# Altium PCB PCB.PcbDoc
Units mil, origin at the board's own origin, x right, y up, seen from the top; angles counter-clockwise.
Board outline 6000 x 4000 mil, 2 copper layers (Top Layer, Bottom Layer); 56 components, 40 nets, 185 pads, 34 vias.
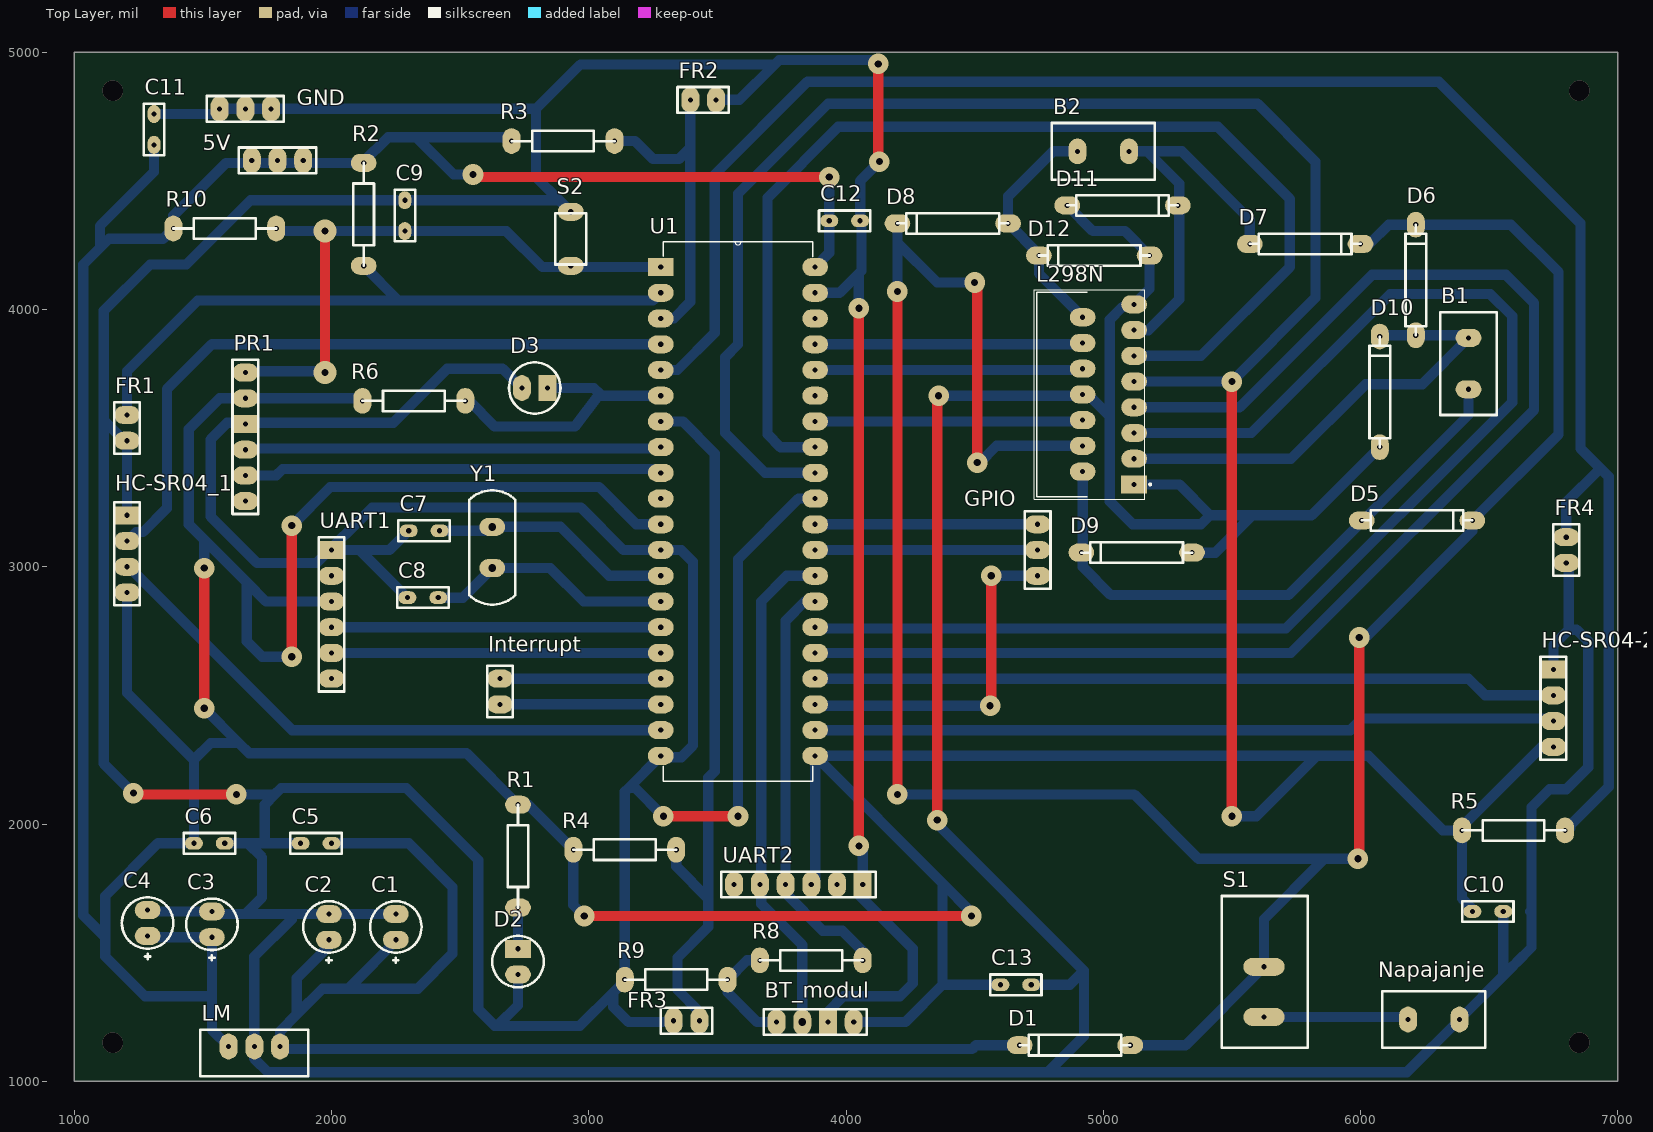
[diagram p0: Top Layer view]
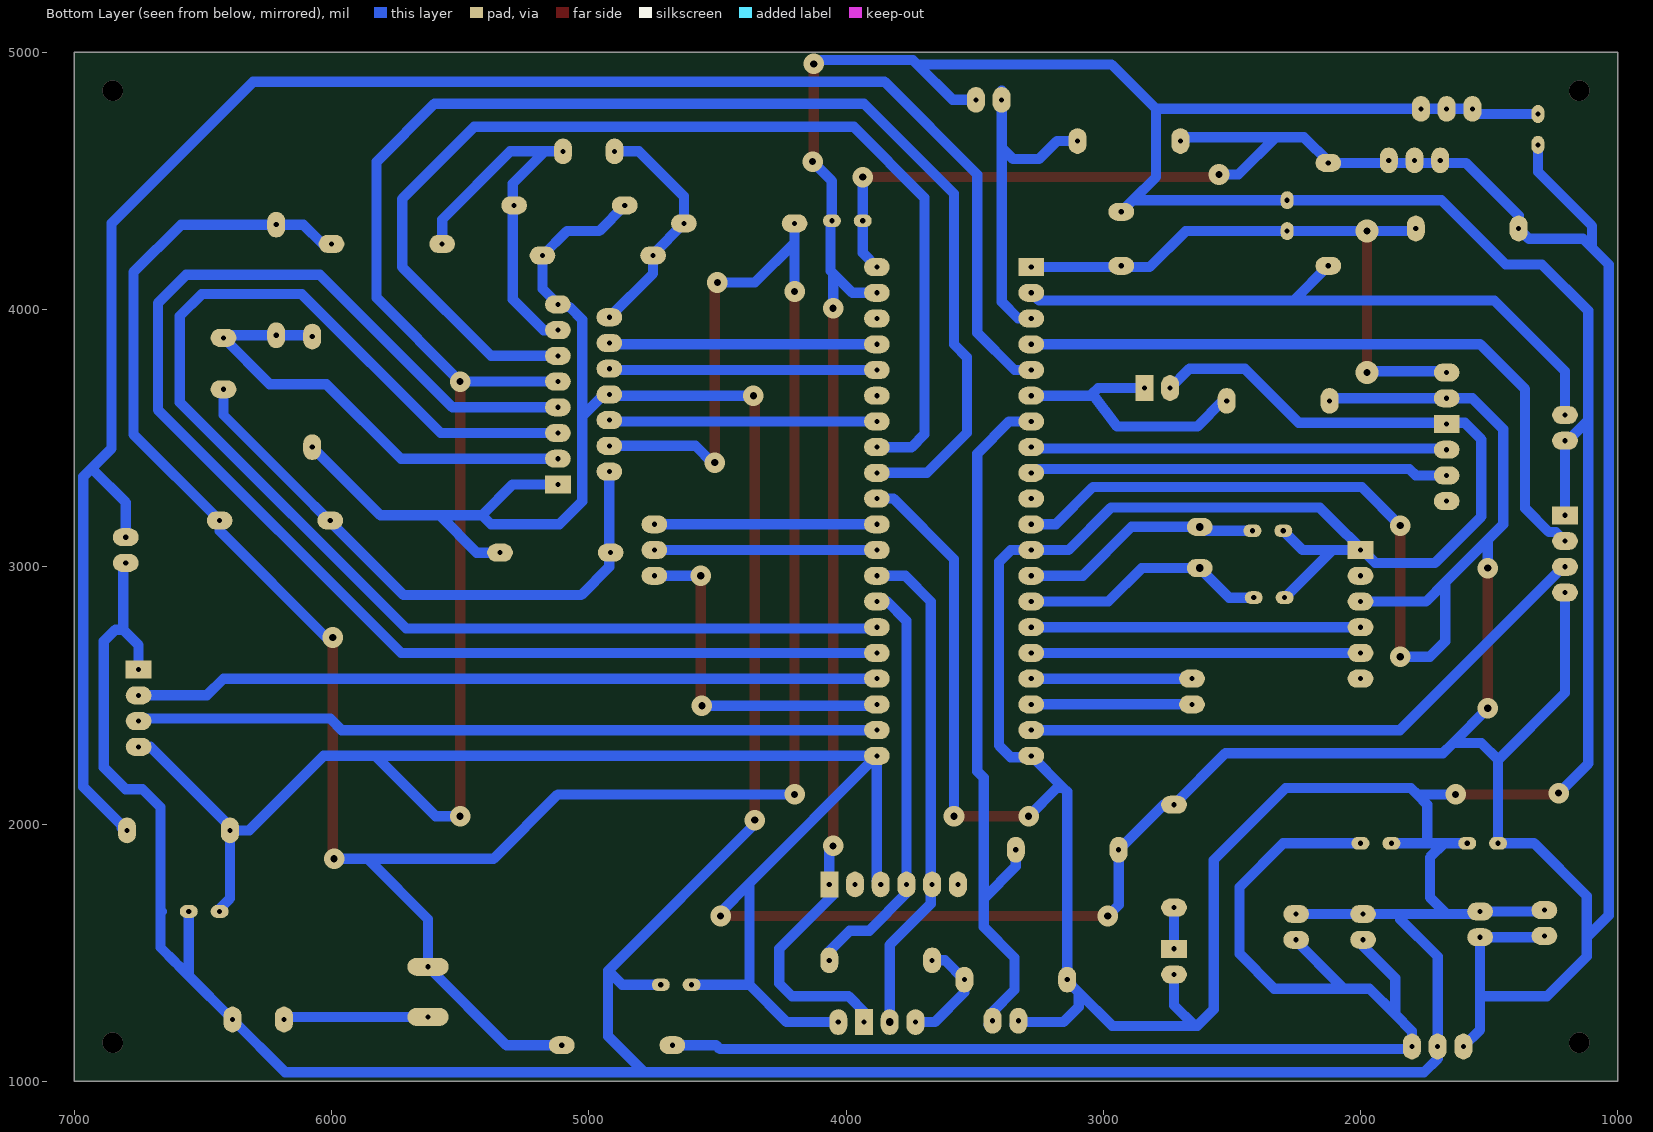
[diagram p1: Bottom Layer view, seen from below]

## Layer stack, top to bottom
Top Solder: solder mask 0.4, Solder Resist, Dk 3.5
Top Layer: signal copper 1.4
Dielectric 1: dielectric 12.6, FR-4, Dk 4.8
Bottom Layer: signal copper 1.4
Bottom Solder: solder mask 0.4, Solder Resist, Dk 3.5

## Board outline
1000,1000 7000,1000 7000,5000 1000,5000

## Design rules (kind name [scope] priority, off if disabled: settings)
Clearance [All] p1: gap=10 ignorepadtopadclearanceinfootprint=FALSE except(0: Arc-Hole Track-Hole SMDPad-Hole THPad-Hole Via-Hole Fill-Hole Poly-Hole Region-Hole Text-Hole)
PolygonConnect [All] p1: connectstyle=Relief reliefconductorwidth=10 reliefentries=4 polygonreliefangle="90 Angle" airgapwidth=10
RoutingVias [All] p1: holewidth=28 width=50 viastyle="Through Hole" minholewidth=28 minwidth=50 maxholewidth=28 maxwidth=50
SolderMaskExpansion [All] p1: expansion=4
Width [All] p1: maxlimit=40 minlimit=40 preferedwidth=40
30 further rules are at their usual default settings.

## Components (designator, comment, footprint, x,y, rotation, side; value= is the part's Value field where it differs from the comment)
5V "POWER1" MOST3 1790,4580 r180 top
B1 "Motor" Kleam 6420,3790 r180 top
B2 "Motor" Kleam 5000,4615 r270 top
BT_modul "BT-modul" BT_CON 3880,1230 r180 top
C1 "Cap Pol1" CAP-rad 2250,1600 r90 top value=220uF
C2 "Cap Pol1" CAP-rad 1990,1600 r90 top value=220uF
C3 "Cap Pol1" CAP-rad 1535,1610 r90 top value=220uF
C4 "Cap Pol1" CAP-rad 1285,1615 r90 top value=220uF
C5 "Cap" CAP-200x80 1940,1925 r180 top value=100nF
C6 "Cap" CAP-200x80 1525,1925 r0 top value=100nF
C7 "Cap" CAP-200x80 2360,3140 r180 top value=33pF
C8 "Cap" CAP-200x80 2355,2880 r0 top value=33pF
C9 "Cap" CAP-200x80 2285,4365 r270 top value=100nF
C10 "Cap" CAP-200x80 6495,1660 r0 top value=100nF
C11 "Cap" CAP-200x80 1310,4700 r90 top value=100nF
C12 "Cap" CAP-200x80 3995,4345 r0 top value=100nF
C13 "Cap" CAP-200x80 4660,1375 r0 top value=100nF
D1 "Diode" DIOD430X80 4890,1140 r180 top
D2 "LED0" LED200mil 2725,1465 r270 top
D3 "LED0" LED200mil 2790,3695 r180 top
D5 "Diode" DIOD430X80 6220,3180 r0 top
D6 "Diode" DIOD430X80 6215,4115 r90 top
D7 "Diode" DIOD430X80 5785,4255 r0 top
D8 "Diode" DIOD430X80 4415,4335 r180 top
D9 "Diode" DIOD430X80 5130,3055 r180 top
D10 "Diode" DIOD430X80 6075,3680 r90 top
D11 "Diode" DIOD430X80 5075,4405 r0 top
D12 "Diode" DIOD430X80 4965,4210 r180 top
FR1 "FotoRes" MOST2 1205,3540 r90 top
FR2 "FotoRes" MOST2 3445,4815 r180 top
FR3 "FotoRes" MOST2 3380,1235 r0 top
FR4 "FotoRes" MOST2 6800,3065 r90 top
GND "POWER2" MOST3 1665,4780 r0 top
GPIO "FREE_PORT" MOST3 4745,3065 r270 top
HC-SR04-2 "HC-SR04" MOST4 6750,2450 r270 top
HC-SR04_1 "HC-SR04" MOST4 1205,3050 r270 top
Interrupt "Imterrupt" MOST2 2655,2515 r90 top
L298N "L298N" TO127P2020X500X2100-15 5120,3320 r180 top
LM "LM7805" LM7805 1700,1100 r180 top
Napajanje "Napajanje" Kleam 6285,1240 r270 top
PR1 "Programator" PIC-PROGRAMATOR 1665,3505 r270 top
R1 "Res1" R430x80 2725,1875 r90 top value=4K7
R2 "Res1" R430x80 2125,4370 r90 top value=10k
R3 "Res1" R430x80 2900,4655 r180 top value=10k
R4 "Res1" R430x80 3140,1900 r180 top value=10k
R5 "Res1" R430x80 6595,1975 r180 top value=10k
R6 "Res1" R430x80 2320,3645 r180 top value=4K7
R8 "Res1" R430x80 3865,1470 r0 top value=4K7
R9 "Res1" R430x80 3340,1395 r0 top value=10k
R10 "Res1" R430x80 1585,4315 r180 top value=10k
S1 "SW-SPST" PREKIDAC 5620,1530 r0 top
S2 "SW-PB" TASTER 2930,4275 r270 top
U1 "DSPIC30F4013" DIP254P1524X635-40 3880,2265 r0 top
UART1 "UART1" MOST6 2000,2815 r90 top
UART2 "UART2" MOST6 3815,1765 r0 top
Y1 "XTAL" XTAL 2625,3075 r270 top

## Footprints (in the part's own frame and the unit in brackets; to place one, negate y for a bottom-side part, rotate by r counter-clockwise, add the part's x,y. Pads: shape width x height; smd on the part's side, far side on the other; paste and mask are expansions set on the pad)
BT_CON [mil]
  oval 70x100 hole 20: 0(-150,0) 3(150,0)
  rect 70x100 hole 20: 1(-50,0)
  oval 70x100 hole 30: 2(50,0)
  silkscreen extent -200,-50 200,50
CAP-200x80 [mil] "CAP od nF i pF"
  oval 70x50 hole 20: 1(-60,0) 2(60,0)
  silkscreen extent -100,-40 100,40
CAP-rad [mil]
  oval 70x100 hole 20: 1(-50,0) 2(50,0)
  silkscreen extent -140,-100 100,100
DIOD430X80 [mil]
  oval 100x70 hole 20: 1(-215,0) 2(215,0)
  silkscreen extent -215,-40 215,40
DIP254P1524X635-40 [mil]
  rect 100x70 hole 20: 1(-600,1900)
  oval 100x70 hole 20: 2(-600,1800) 3(-600,1700) 4(-600,1600) 5(-600,1500) 6(-600,1400) 7(-600,1300) 8(-600,1200) 9(-600,1100) 10(-600,1000) 11(-600,900) 12(-600,800) 13(-600,700) 14(-600,600) 15(-600,500) 16(-600,400) 17(-600,300) 18(-600,200) 19(-600,100) 20(-600,0) 21(0,0) 22(0,100) 23(0,200) 24(0,300) 25(0,400) 26(0,500) 27(0,600) 28(0,700) 29(0,800) 30(0,900) 31(0,1000) 32(0,1100) 33(0,1200) 34(0,1300) 35(0,1400) 36(0,1500) 37(0,1600) 38(0,1700) 39(0,1800) 40(0,1900)
  silkscreen extent -590,-98 -10,1998
Kleam [mil]
  oval 100x70 hole 20: 1(0,100) 2(0,-100)
  silkscreen extent -110,-200 110,200
LED200mil [mil]
  rect 70x100 hole 20: 1(-50,0)
  oval 70x100 hole 20: 2(50,0)
  silkscreen extent -100,-100 100,100
LM7805 [mil]
  oval 70x100 hole 20: 1(-100,-35) 2(0,-35) 3(100,-35)
  silkscreen extent -210,-100 210,80
MOST2 [mil]
  oval 70x100 hole 20: 1(-50,0) 2(50,0)
  silkscreen extent -100,-50 100,50
MOST3 [mil]
  oval 70x100 hole 20: 0(-100,0) 1(0,0) 2(100,0)
  silkscreen extent -150,-50 150,50
MOST4 [mil] "Konektor 400x100"
  rect 70x100 hole 20: 1(-150,0)
  oval 70x100 hole 20: 2(-50,0) 3(50,0) 4(150,0)
  silkscreen extent -200,-50 200,50
MOST6 [mil]
  oval 70x100 hole 20: 0(-250,0) 1(-150,0) 2(-50,0) 3(50,0) 4(150,0)
  rect 70x100 hole 20: 5(250,0)
  silkscreen extent -300,-50 300,50
PIC-PROGRAMATOR [mil]
  oval 70x100 hole 20: 1(-250,0) 2(-150,0) 4(50,0) 5(150,0) 6(250,0)
  rect 70x100 hole 20: 3(-50,0)
  silkscreen extent -300,-50 300,50
PREKIDAC [mil]
  oval 160x70 hole 20: 1(5,-280) 2(5,-85)
  silkscreen extent -160,-400 175,190
R430x80 [mil] "430 mils sa 80 mils"
  oval 70x100 hole 20: 1(-200,0) 2(200,0)
  silkscreen extent -200,-40 200,40
TASTER [mil] "200x120"
  oval 70x100 hole 20: 1(-105,0) 2(105,0)
  silkscreen extent -100,-60 100,60
TO127P2020X500X2100-15 [mil]
  rect 100x70 hole 20: 1(0,0)
  oval 100x70 hole 20: 2(200,-50) 3(0,-100) 4(200,-150) 5(0,-200) 6(200,-250) 7(0,-300) 8(200,-350) 9(0,-400) 10(200,-450) 11(0,-500) 12(200,-550) 13(0,-600) 14(200,-650) 15(0,-700)
  silkscreen extent -67,-757 389,57
XTAL [mil] "ZA OSCILATOR"
  oval 70x100 hole 30: 1(-80,0) 2(80,0)
  silkscreen extent -222,-90 222,90

## Part data
5V GND: library part POWER
B1 B2: "Motor, General Kind", LatestRevisionDate=17-Jul-2002, LatestRevisionNote="Re-released for DXP Platform.", PackageDescription="Capacitor (Radial); 2 Leads", PackageReference=RB5-10.5, Published=24-Mar-1999, Publisher="Altium Limited"
C1 C2 C3 C4: "Polarized Capacitor (Radial)", LatestRevisionDate=17-Jul-2002, LatestRevisionNote="Re-released for DXP Platform.", PackageDescription="Polarized Capacitor (Radial); 2 Leads", PackageReference=RB7.6-15, Published=8-Jun-2000, Publisher="Altium Limited"
C5 C6 C7 C8 C9 C10 C11 C12 C13: "Capacitor", LatestRevisionDate=17-Jul-2002, LatestRevisionNote="Re-released for DXP Platform.", PackageDescription="Radial Cap, Thru-Hole; 2 Leads; 0.3 in Pin Spacing", PackageReference=RAD-0.3, Published=8-Jun-2000, Publisher="Altium Limited"
D1 D5 D6 D7 D8 D9 D10 D11 D12: "Default Diode", Code_JEDEC=DO-214-AB, LatestRevisionDate=17-Jul-2002, LatestRevisionNote="Re-released for DXP Platform.", PackageDescription="DO-214-AB/SMC; 2 C-Bend Leads; Body 7.9 x 5.9 mm, inc. leads (LxW)", PackageReference=SMC, PackageVersion=Sep-1996, Published=8-Jun-2000, Publisher="Altium Limited"
D2 D3: "Typical INFRARED GaAs LED", LatestRevisionDate=08-Jul-2005, LatestRevisionNote="Mech Layer 1 removed.", PackageDescription="LED; 2 Leads", PackageReference=LED-0, Published=8-Jun-2000, Publisher="Altium Limited"
Interrupt Napajanje: library part "Header 2", "Header, 2-Pin", LatestRevisionDate=17-Jul-2002, LatestRevisionNote="Re-released for DXP Platform.", Publisher="Altium Limited"
R1 R2 R3 R4 R5 R6 R8 R9 R10: "Resistor", LatestRevisionDate=17-Jul-2002, LatestRevisionNote="Re-released for DXP Platform.", PackageDescription="Axial Device, Thru-Hole; 2 Leads; 0.3 in Pin Spacing", PackageReference=AXIAL-0.3, Published=8-Jun-2000, Publisher="Altium Limited"
S1: "Single-Pole, Single-Throw Switch", LatestRevisionDate=17-Jul-2002, LatestRevisionNote="Re-released for DXP Platform.", PackageDescription="Switch; 2 Leads", PackageReference=SPST-2, Published=24-Mar-1999, Publisher="Altium Limited"
S2: "Switch", LatestRevisionDate=17-Jul-2002, LatestRevisionNote="Re-released for DXP Platform.", PackageDescription="Switch; 2 Leads", PackageReference=SPST-2, Published=24-Mar-1999, Publisher="Altium Limited"
U1: library part DSPIC30F4013-20I/P, "High-Performance 16-bit Digital Signal Controller, 48 KB Flash, 2 KB SRAM, 1 KB EEPROM, 40-Pin PDIP, Industrial Temperature", Supplier Part Number 1=DSPIC30F4013-20IP-ND, ComponentLink1Description=Datasheet, ComponentLink1URL=http://ww1.microchip.com/downloads/en/DeviceDoc/70138F.pdf, ComponentLink2Description="Packaging Specification", ComponentLink2URL=http://www.microchip.com/stellent/groups/techpub_sg/documents/packagingspec/en012702.pdf, ComponentLink3Description="Microchip.com Home", ComponentLink3URL=http://www.microchip.com/, DatasheetVersion="revF, Apr-2008", PackageDescription="40-Lead Plastic Dual In-Line (P) - 600 mil Body [PDIP]", PackageReference=PDIP600-P40, PackageVersion="revBB, Aug-2009", Published=29-Jan-2009, Publisher="Altium Limited", Supplier 1=Digi-Key, Supplier 2=Farnell, Supplier Part Number 2=1439755
UART1 UART2: library part UART
Y1: "Crystal Oscillator", LatestRevisionDate=17-Jul-2002, LatestRevisionNote="Re-released for DXP Platform.", PackageDescription="Crystal, Thru-Hole; 2 Leads; Body 3.1 x 8.2 mm (Dia.xH)", PackageReference=R38, Published=8-Jun-2000, Publisher="Altium Limited"

## Via types
v1: diameter 80, hole 28, Top Layer to Bottom Layer, 28 vias
v2: diameter 80, hole 80, Top Layer to Bottom Layer, 4 vias
v3: diameter 90, hole 28, Top Layer to Bottom Layer, 2 vias

## Nets (pads, with @x,y where several pads share a name; then routed paths per layer and width w, separated by ;. In a path a pad name is that pad's centre, name@x,y a point inside that pad or via, vN(x,y) a via of type N, cw(c..) or ccw(c..) an arc to the next point about the centre after c; other vN are vias at no path point)
+5V: 5V.0 5V.1 5V.2 BT_modul.0 C3.1 C4.1 C6.1 C10.1 C11.1 C12.1 C13.1 HC-SR04-2.4 HC-SR04_1.4 L298N.9 LM.3 PR1.2 R1.2 R2.2 R3.2 R4.2 R5.2 R6.2 R10.2 U1.11 U1.21 U1.32 U1.40 UART1.3 UART2.3 | length 31697.3
  Top Layer w40: v1(1505,2450) v1(1505,2995) ; v1(1845,3160) v1(1845,2650) v1@1850,2645 ; v1@2555,4515 v1(3935,4515) ; v1(2982.5,1642.5) v1(4487.5,1642.5) ; v1(5500,2030) v1(5500,3720)
  Bottom Layer w40: HC-SR04_1.4 1205,2510 1465,2250 ; C4.1 1290,1560 C3.1 1535,1330 ; C11.1 1310,4535 1100,4325 1100,4250 1105,4245 ; v1(1505,2450) 1640,2315 ; v1(1505,2995) 1505,3105 ; LM.3 1535,1200 1535,1330 ; v1(1845,2650) 1730,2650 1670,2710 1670,2940 ; v1(1845,3160) 1995,3310 3040,3310 3185,3165 U1.11 ; UART1.3 1745,2865 1670,2940 ; R6.2@2105,3645 2095,3655 PR1.2 1565,3655 1445,3535 1445,3165 1505,3105 ; v1(2550,4525) 2475,4525 2330,4670 ; R3.2@2685,4655 2670,4670 2330,4670 ; R4.2@2940,1860 2940,1685 v1(2982.5,1642.5) ; R4.2 2765,2075 R1.2 2525,2275 1680,2275 1640,2315 ; UART2.3 3880,1780 U1.21 ; U1.32 3685,3365 3530,3520 3530,3815 3580,3865 3580,4450 3930,4800 5600,4800 5825,4575 5825,4045 v1(5500,3720) L298N.9 ; U1.40 3935,4220 C12.1 v1(3935,4515) ; BT_modul.0@4060,1230 4230,1230 4375,1375 ; v1(4487.5,1642.5) 4487.5,1657.5 4375,1770 ; C13.1 4375,1375 ; v1(5500,2030) 5595,2030 5825,2260 5820,2265 ; C10.1 6435,1670 6395,1710 R5.2 R5.2@6380,1975 ; HC-SR04-2.4 6705,2300 R5.2@6380,1975 ; 1105,4245 1135,4275 1345,4275 R10.2 1385,4365 1590,4570 1890,4570 2120,4570 2220,4670 2330,4670 ; 1105,4245 1035,4175 1035,1645 1120,1560 ; 1120,1560 1120,1485 1275,1330 1535,1330 ; 1120,1560 1120,1720 1325,1925 C6.1 1465,2250 ; 1465,2250 1530,2315 1640,2315 ; 1505,3105 1670,2940 ; U1.21 4375,1770 ; U1.21 5820,2265 ; 4375,1375 4375,1770 ; 5820,2265 6030,2265 6320,1975 R5.2@6380,1975
GND: BT_modul.1 C1.2 C2.2 C3.2 C4.2 C5.2 C6.2 C7.2 C8.1 C9.1 C10.2 C11.2 C12.2 C13.2 D2.2 D3.2 D9.1 D10.1 D11.1 D12.1 FR1.1 FR2.1 FR3.1 FR4.1 GND.0 GND.1 GND.2 HC-SR04-2.1 HC-SR04_1.1 L298N.1 L298N.8 L298N.15 LM.2 Napajanje.1 PR1.3 R9.1 S2.1 U1.12 U1.20 U1.31 U1.39 UART1.5 UART2.5 | length 40457.4
  Top Layer w40: v1(1230,2120) 1240,2130 1255,2115 v1(1630,2115) ; v1@3300,2030 v1(3580,2030) ; v1(4050,1915) v1(4050,4005) ; v1(4125,4955) 4125,4590 4115,4580 4125,4570 v1(4130,4575) ; v1(4355,2015) 4355,3650 4350,3655 v1(4360,3665)
  Bottom Layer w40: FR1.1@1185,3500 1115,3570 ; HC-SR04_1.1 FR1.1 ; v1(1230,2120) 1115,2235 1115,3570 ; C4.2 1290,1660 C3.2 1545,1650 1665,1650 ; C11.2 1545,4760 GND.0 GND.1 GND.2 2795,4780 ; C6.2 1675,1925 ; v1(1630,2115) 1780,2115 ; C5.2 1740,1925 ; UART1.5 2110,3065 ; C1.2 C2.2 1845,1650 ; C8.1@2300,2885 C8.1 2110,3065 ; C7.2 2225,3065 2110,3065 ; D2.2 2725,1295 2645,1215 ; D3.2 2665,3770 2450,3770 2240,3560 1595,3560 1530,3495 1530,3195 1710,3015 1943.08,3015 2158.08,3230 2970,3230 3135,3065 U1.12 3360,3065 3405,3020 3405,2305 3360,2260 U1.20@3285,2260 ; S2.1 2885,4425 ; U1.20 3155,2140 ; v1(3290,2030) 3180,2140 3155,2140 ; FR3.1@3345,1220 3335,1230 3155,1230 3095,1290 3095,1345 ; FR2.1 3585,4815 3722.5,4952.5 ; v1(3580,2030) 3580,3030 3815,3265 U1.31 ; U1.39 3975,4065 4050,4140 ; BT_modul.1@3930,1200 BT_modul.1 3930,1270 3990,1330 4210,1330 4260,1380 4260,1515 4052.06,1722.94 4052.06,1761.76 4053.58,1767.85 4065,1813.53 4065,1900 v1(4050,1915) v1@4050,1920 ; v1(4050,4005) 4050,4140 ; v1(4125,4955) 4110,4955 4095,4970 3740,4970 3722.5,4952.5 ; v1(4130,4575) 4055,4500 C12.2 4060,4340 4060,4150 4050,4140 ; v1(4355,2015) 4355,2010 4350,2005 4925,1430 ; v1(4360,3665) 4915,3665 L298N.8 4940,3670 5025,3585 ; C13.2 4870,1375 4925,1430 ; 4790,1040 4925,1175 4925,1430 ; D11.1 4960,4305 5085,4305 D12.1 5180,4080 L298N.15 5110,4010 5075,4010 5025,3960 5025,3585 ; L298N.1 5295,3320 5415,3200 ; D9.1 5435,3055 5580,3200 ; D10.1 5810,3200 5580,3200 ; C10.2 6555,1410 ; 6592.5,1447.5 6555,1410 ; 6605,1460 6665,1520 6665,1655 ; 6660,1660 6665,1655 ; HC-SR04-2.1 6750,2695 6810,2755 ; FR4.1 6810,3005 6810,2755 ; 1115,3570 1115,3995 1295,4175 1435,4175 1685,4425 C9.1 2885,4425 ; 1665,1650 1730,1715 1730,1870 1675,1925 ; 1665,1650 1845,1650 ; 1675,1925 1740,1925 ; 1740,1925 1740,2075 1780,2115 ; 1780,2115 1805,2140 2290,2140 2570,1860 2570,1280 2635,1215 2645,1215 ; 1845,1650 1845,1630 1700,1485 LM.2 1700,1088.08 1753.08,1035 6180,1035 Napajanje.1 6555,1410 ; 2645,1215 2965,1215 3095,1345 ; 2795,4780 2795,4515 2885,4425 ; 2795,4780 2967.5,4952.5 3722.5,4952.5 ; 3095,1345 3140,1390 R9.1 3140,2125 3155,2140 ; 5025,3585 5025,3255 5115,3165 5380,3165 5415,3200 ; 5415,3200 5580,3200 ; 6665,1655 6665,2065 6735,2135 6800,2135 6885,2220 6885,2710 6840,2755 6810,2755
IN1: L298N.5 U1.26 | length 5140.5
  Bottom Layer w40: U1.26 3885,2760 5710,2760 6590,3640 6590,3975 6505,4060 6115,4060 5575,3520 L298N.5
IN2: L298N.7 U1.25 | length 5429.5
  Bottom Layer w40: U1.25@3890,2675 U1.25 5730,2665 6675,3610 6675,4025 6565,4135 6045,4135 5530,3620 L298N.7
IN3: L298N.10 U1.36 | length 1042.1
  Bottom Layer w40: U1.36 4915,3765 L298N.10
IN4: L298N.12 U1.37 | length 1042.1
  Bottom Layer w40: U1.37 4915,3865 L298N.12
INT1: Interrupt.1 U1.18 | length 625
  Bottom Layer w40: Interrupt.1 U1.18
INT2: Interrupt.2 U1.17 | length 625
  Bottom Layer w40: Interrupt.2 U1.17
NetC1_1: C1.1 C2.1 C5.1 D1.2 LM.1 | length 5143.4
  Bottom Layer w40: C2.1 1990,1525 1865,1400 1865,1260 ; C5.1 2300,1925 2470,1755 2470,1495 2335,1360 1965,1360 1865,1260 ; 2075,1370 C1.1@2260,1555 ; D1.2 4505,1140 4490,1125 1810,1125 LM.1 1800,1195 1865,1260
NetC9_2: C9.2 PR1.1 R10.1 S2.2 U1.1 | length 2413
  Top Layer w40: v3(1975,3755) v3(1975,4305)
  Bottom Layer w40: PR1.1@1665,3760 v3@1975,3760 ; R10.1@1785,4305 v3(1975,4305) C9.2 2680,4305 2820,4165 U1.1
NetD2_1: D2.1 R1.1 | length 160
  Bottom Layer w40: D2.1 R1.1
NetNapajanje_2: Napajanje.2 S1.1 | length 564.1
  Bottom Layer w40: S1.1 6175,1250 Napajanje.2
OSCI1: C7.1 U1.13 Y1.1 | length 944.9
  Bottom Layer w40: C7.1 2610,3140 Y1.1 2890,3155 3080,2965 U1.13
OSCI2: C8.2 U1.14 Y1.2 | length 966.5
  Bottom Layer w40: C8.2 2510,2880 Y1.2 2850,2995 2980,2865 U1.14
OUT1: B1.1 D5.1 D9.2 L298N.2 | length 2305.5
  Bottom Layer w40: L298N.2 4920,3000 5030,2890 5720,2890 6420,3590 B1.1
OUT2: B1.2 D6.1 D10.2 L298N.3 | length 1882.1
  Bottom Layer w40: L298N.3 5730,3420 6020,3710 6240,3710 B1.2 ; D10.2@6075,3890 6085,3900 D6.1 B1.2@6410,3900 ; B1.2@6410,3900 B1.2 ; B1.2@6410,3900 6430,3900 B1.2
OUT3: B2.1 D7.1 D11.2 L298N.13 | length 1540.2
  Bottom Layer w40: B2.1 5170,4615 ; L298N.13@5113.08,3920 L298N.13 5175,3920 5295,4040 5295,4490 5170,4615 ; D7.1@5565,4250 D7.1 5570,4350 5305,4615 5170,4615
OUT4: B2.2 D8.1 D12.2 L298N.14 | length 932.6
  Bottom Layer w40: B2.2 4805,4615 4630,4440 D8.1 4750,4215 D12.2 4750,4140 L298N.14
PWM1: L298N.6 U1.34 | length 1042.1
  Bottom Layer w40: U1.34 4915,3565 L298N.6
PWM2: L298N.11 U1.33 | length 4398.5
  Bottom Layer w40: U1.33 3745,3465 3695,3515 3695,4435 3970,4710 5445,4710 5725,4430 5725,4165 5380,3820 L298N.11
RB0: FR1.2 R2.1 U1.2 | length 2562.3
  Bottom Layer w40: FR1.2 1205,3760 1480,4035 2260,4035 ; R2.1 2260,4035 ; U1.2 3250,4035 2260,4035
RB1: FR2.2 R3.1 U1.3 | length 1289.6
  Bottom Layer w40: R3.1@3115,4655 3180,4655 3250,4585 3350,4585 3395,4630 ; U1.3 3330,3965 3395,4030 3395,4630 ; FR2.2@3395,4850 FR2.2 3395,4630
RB2: HC-SR04_1.2 U1.4 | length 2662.8
  Bottom Layer w40: HC-SR04_1.2 1240,3135 1267.43,3135 1360,3227.57 1360,3690 1535,3865 U1.4
RB3: FR4.2 R5.1 U1.5 | length 7403.5
  Bottom Layer w40: U1.5 3345,3765 3490,3910 3490,4525 3850,4885 6305,4885 6855,4335 6855,3460 6965,3350 6965,2145 6815,1995 R5.1@6815,1985 ; FR4.2 6800,3250 6930,3380
RB4: D3.1 R6.1 U1.6 | length 1074.3
  Bottom Layer w40: R6.1@2535,3645 2635,3545 2945,3545 3042.64,3672.36 ; D3.1@2830,3695 D3.1 3020,3695 3042.64,3672.36 ; U1.6 3050,3665 3042.64,3672.36
RB5: FR3.2 R4.1 U1.7 | length 2831.2
  Bottom Layer w40: U1.7 3365,3565 3490,3440 3490,2205 3465,2180 3465,1710 ; R4.1@3355,1900 3340,1885 3340,1835 3465,1710 ; FR3.2@3445,1220 FR3.2 3430,1270 3345,1355 3345,1480 3465,1600 3465,1710
RB6: PR1.4 U1.8 | length 1619.1
  Bottom Layer w40: PR1.4 1670,3460 3275,3460 U1.8
RB7: PR1.5 U1.9 | length 1631.6
  Bottom Layer w40: PR1.5 1785,3355 1810,3380 3265,3380 U1.9
RD2: HC-SR04-2.3 U1.22 | length 2892.8
  Bottom Layer w40: U1.22 5960,2365 6005,2410 6740,2410 HC-SR04-2.3
RD3: HC-SR04_1.3 U1.19 | length 2338
  Bottom Layer w40: HC-SR04_1.3 1211.92,3000 1846.92,2365 U1.19
RD8: GPIO.2 U1.23 | length 1369.1
  Top Layer w40: v1(4560,2460) 4565,2465 v1(4565,2965)
  Bottom Layer w40: U1.23 3885,2460 v1(4560,2460) ; v1(4565,2965) GPIO.2
RF0: GPIO.0 U1.30 | length 865
  Bottom Layer w40: U1.30 GPIO.0
RF1: GPIO.1 U1.29 | length 865
  Bottom Layer w40: U1.29 GPIO.1
RF6: HC-SR04-2.2 U1.24 | length 2896.9
  Bottom Layer w40: U1.24 6420,2565 6485,2500 HC-SR04-2.2
RX_BT: BT_modul.3 R8.1 R9.2 | length 448.7
  Bottom Layer w40: R8.1 3615,1470 R9.2 3540,1345 3655,1230 BT_modul.3 BT_modul.3@3730,1225
U2RX: BT_modul.2 U1.28 UART2.1 | length 1952.7
  Bottom Layer w40: BT_modul.2 3830,1530 3670,1690 3670,2865 3770,2965 U1.28
U2TX: R8.2 U1.27 UART2.2 | length 1634.3
  Bottom Layer w40: U1.27 3840,2865 3765,2790 UART2.2 3765,1730 3910,1585 3985,1585 4065,1505 R8.2
UA1RX: U1.16 UART1.1 | length 1280
  Bottom Layer w40: UART1.1 U1.16
UA1TX: U1.15 UART1.2 | length 1280
  Bottom Layer w40: UART1.2 U1.15
VCC: D1.1 D5.2 D6.2 D7.2 D8.2 L298N.4 S1.2 | length 10257.6
  Top Layer w40: v1(4200,2115) v1(4200,4070) ; v1(4510,3405) v1@4510,4105 ; v1@5995,1865 v1(5995,2725)
  Bottom Layer w40: v1(4200,2115) 5120,2115 5370,1865 5850,1865 ; v1(4200,4070) 4200,4260 ; D8.2 4200,4260 ; v1(4500,4105) 4355,4105 4200,4260 ; v1@4520,3405 4585,3470 L298N.4 ; D1.1 5320,1140 S1.2 5625,1630 5850,1855 5850,1865 ; v1(5990,1865) 5850,1865 ; v1(5995,2725) 6020,2725 6435,3140 D5.2 6770,3515 6770,4145 6585,4330 D6.2 6110,4330 6035,4255 D7.2
pads on no net: PR1.6 U1.10 U1.35 U1.38 UART1.0 UART1.4 UART2.0 UART2.4
copper on no net:
  other v2: 1150,1150 6850,1150 1150,4850 6850,4850